# Altium PCB Pmod_RS232.PcbDoc
Units mm, origin at the board's own origin, x right, y up, seen from the top; angles counter-clockwise.
Board outline 40 x 35 mm, 2 copper layers (Top Layer, Bottom Layer); 13 components, 21 nets, 53 pads, 7 vias.
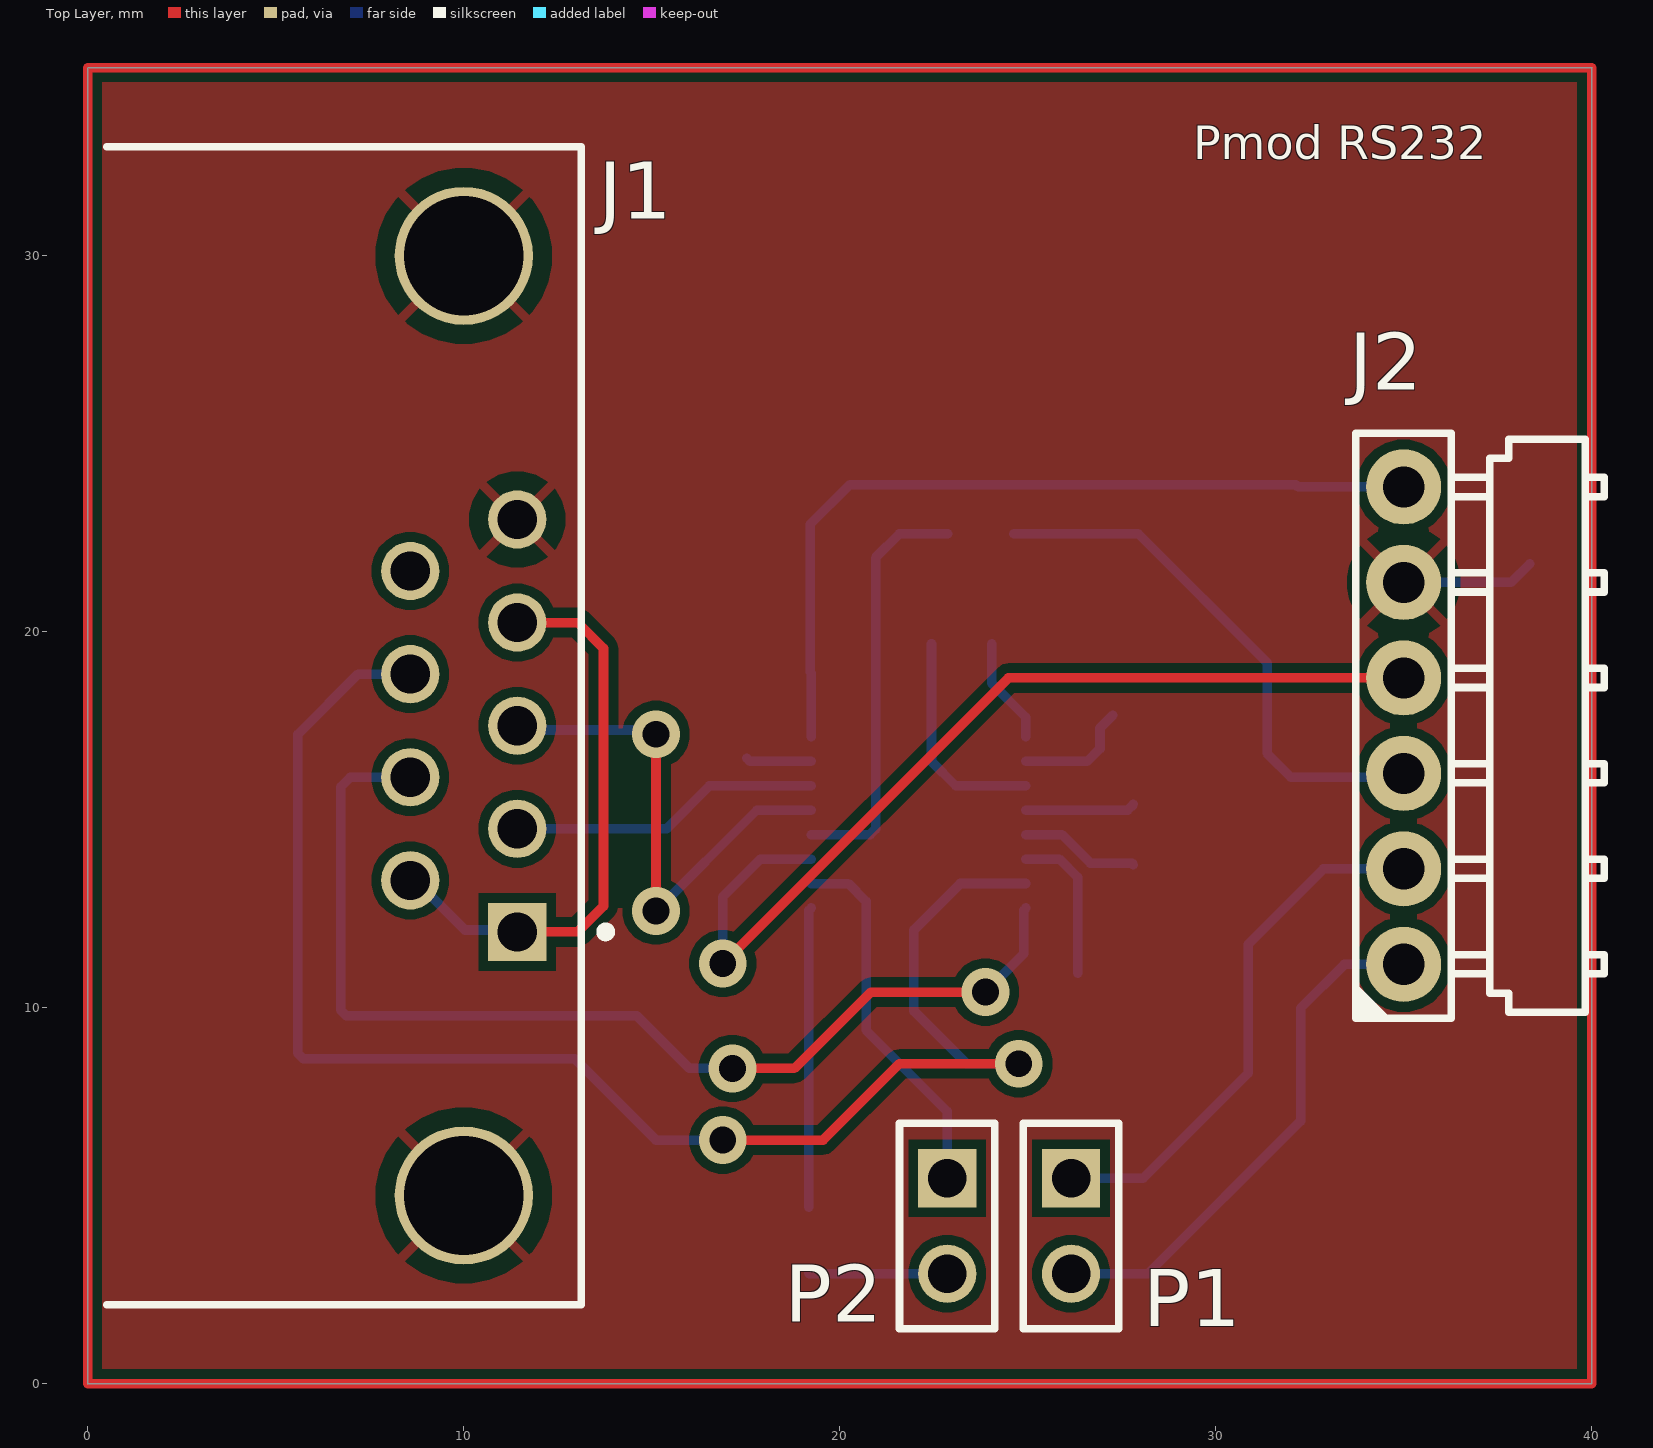
[diagram p0: Top Layer view]
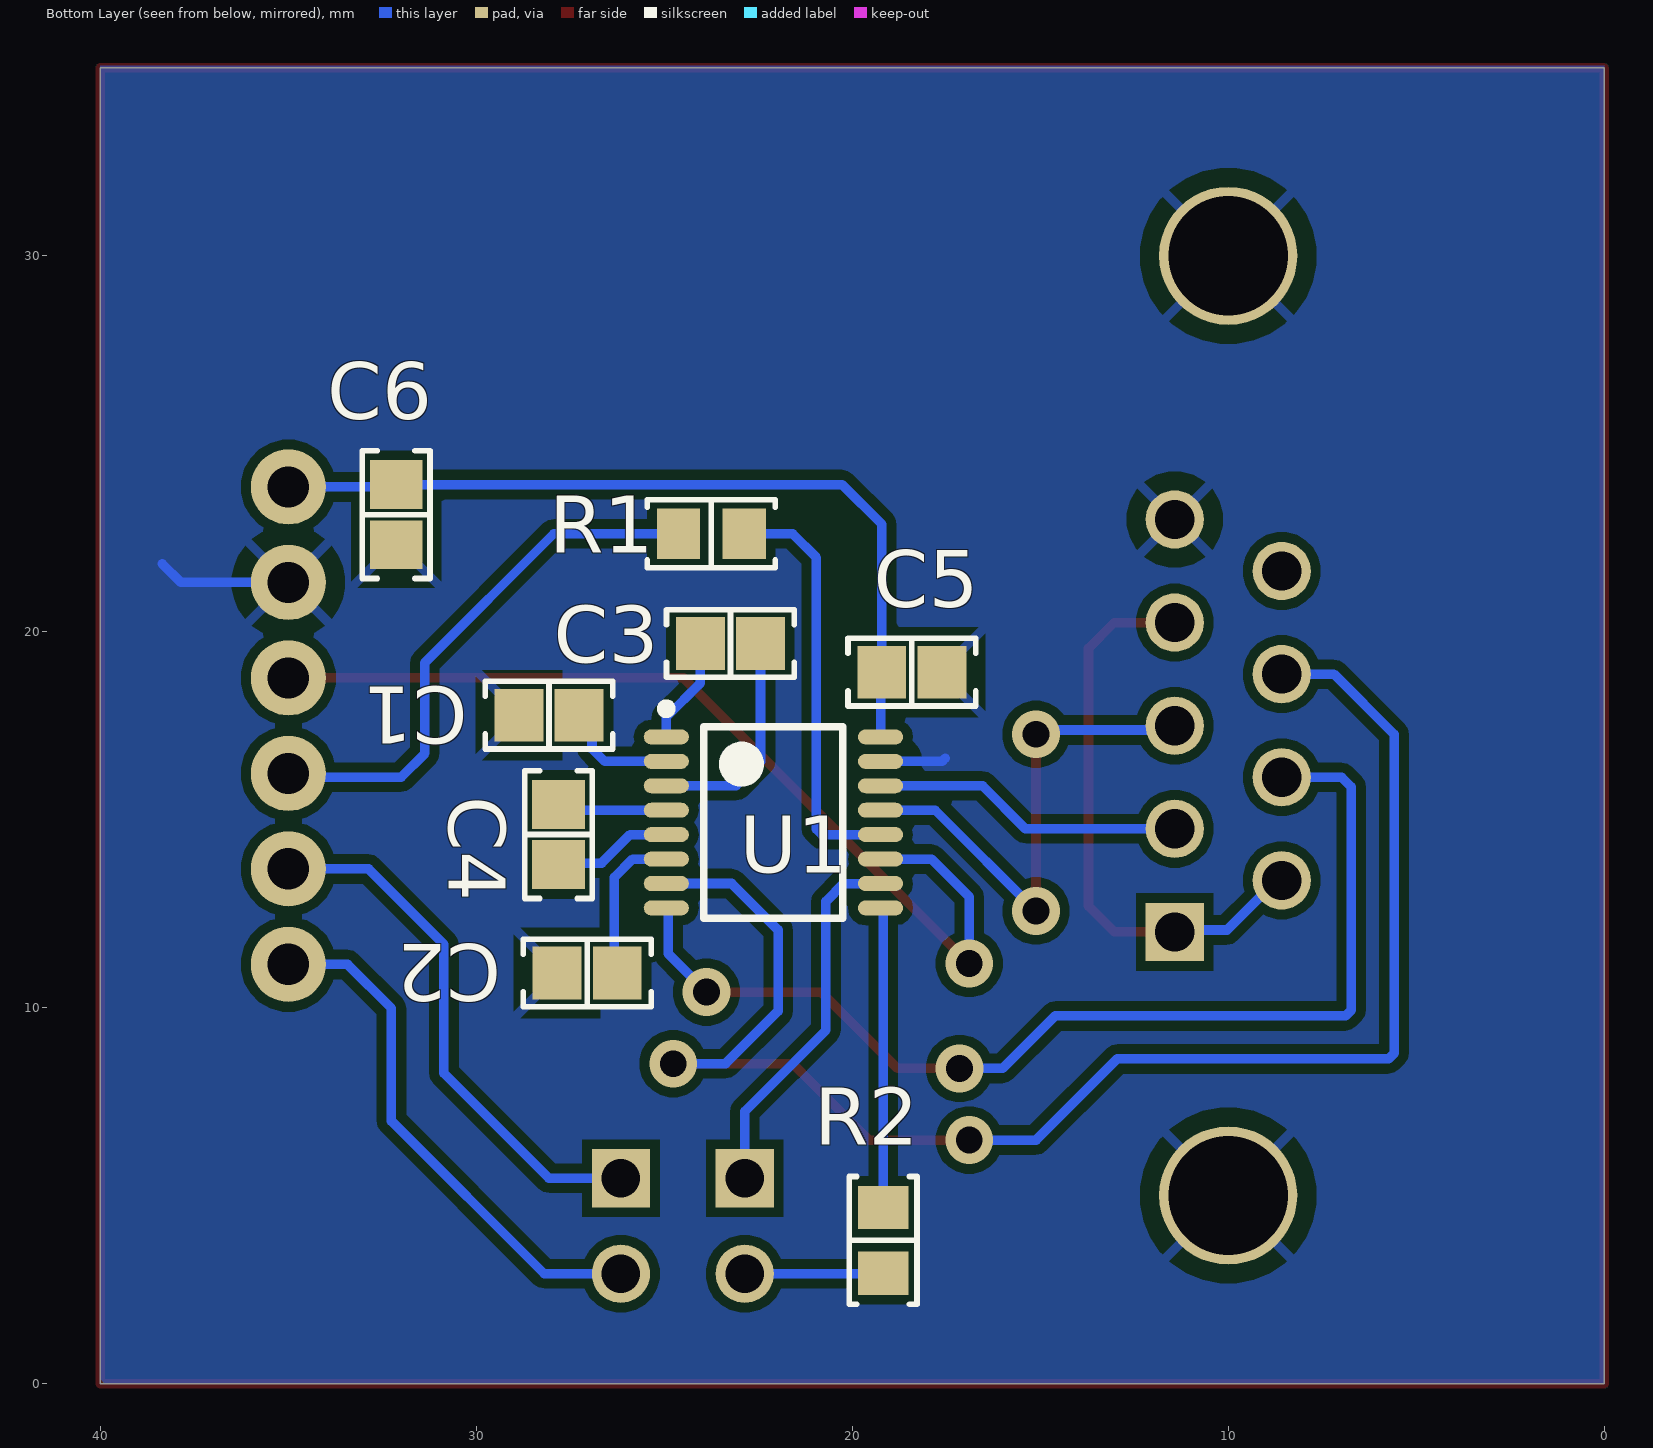
[diagram p1: Bottom Layer view, seen from below]
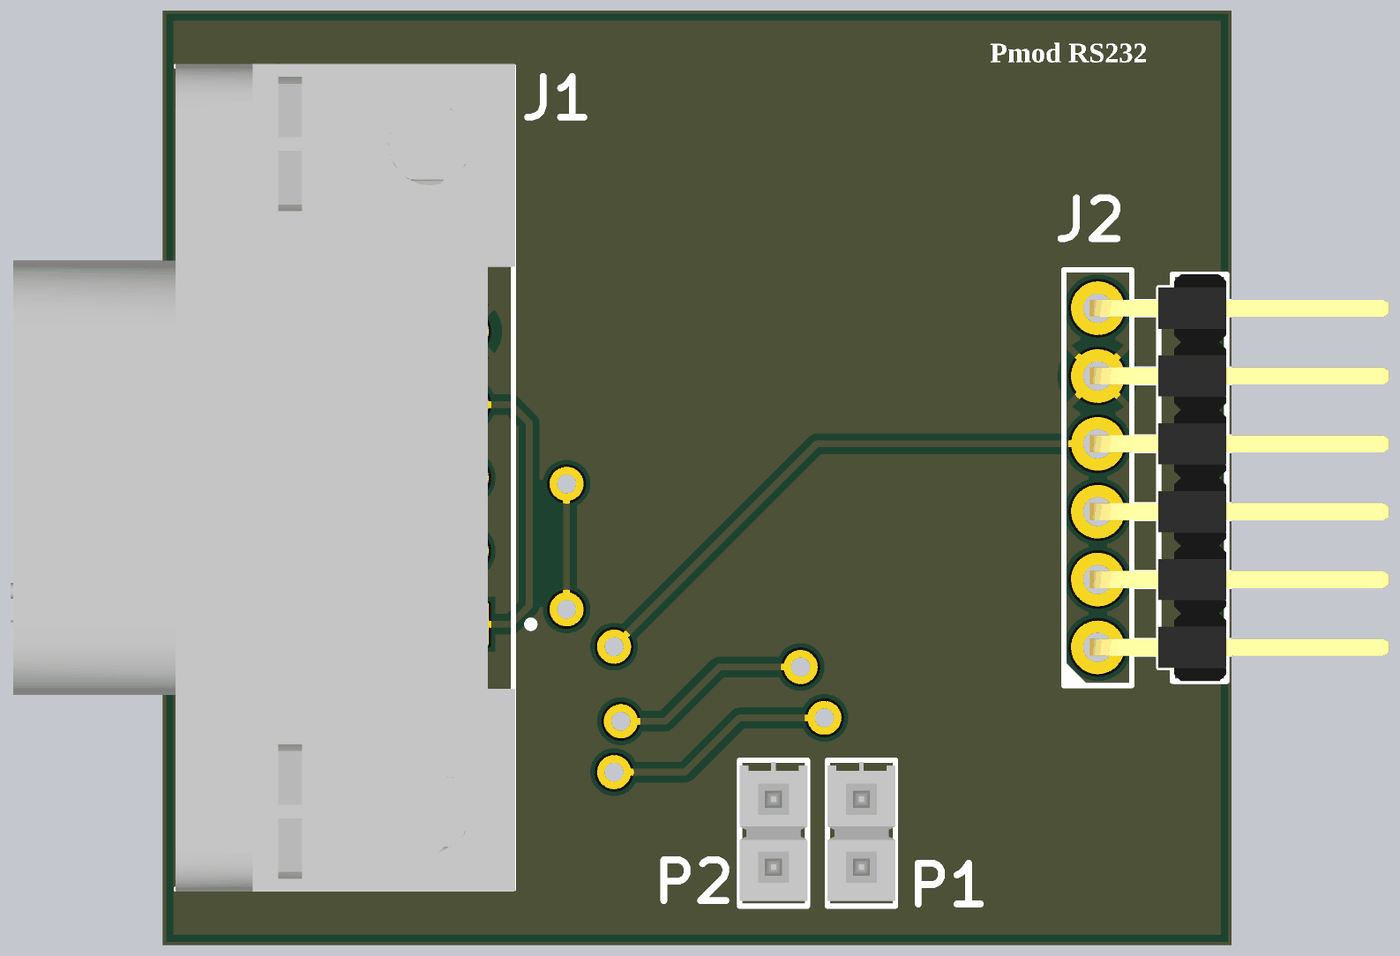
[diagram p2: 3D render of the assembled board from above, using the file's embedded part models]
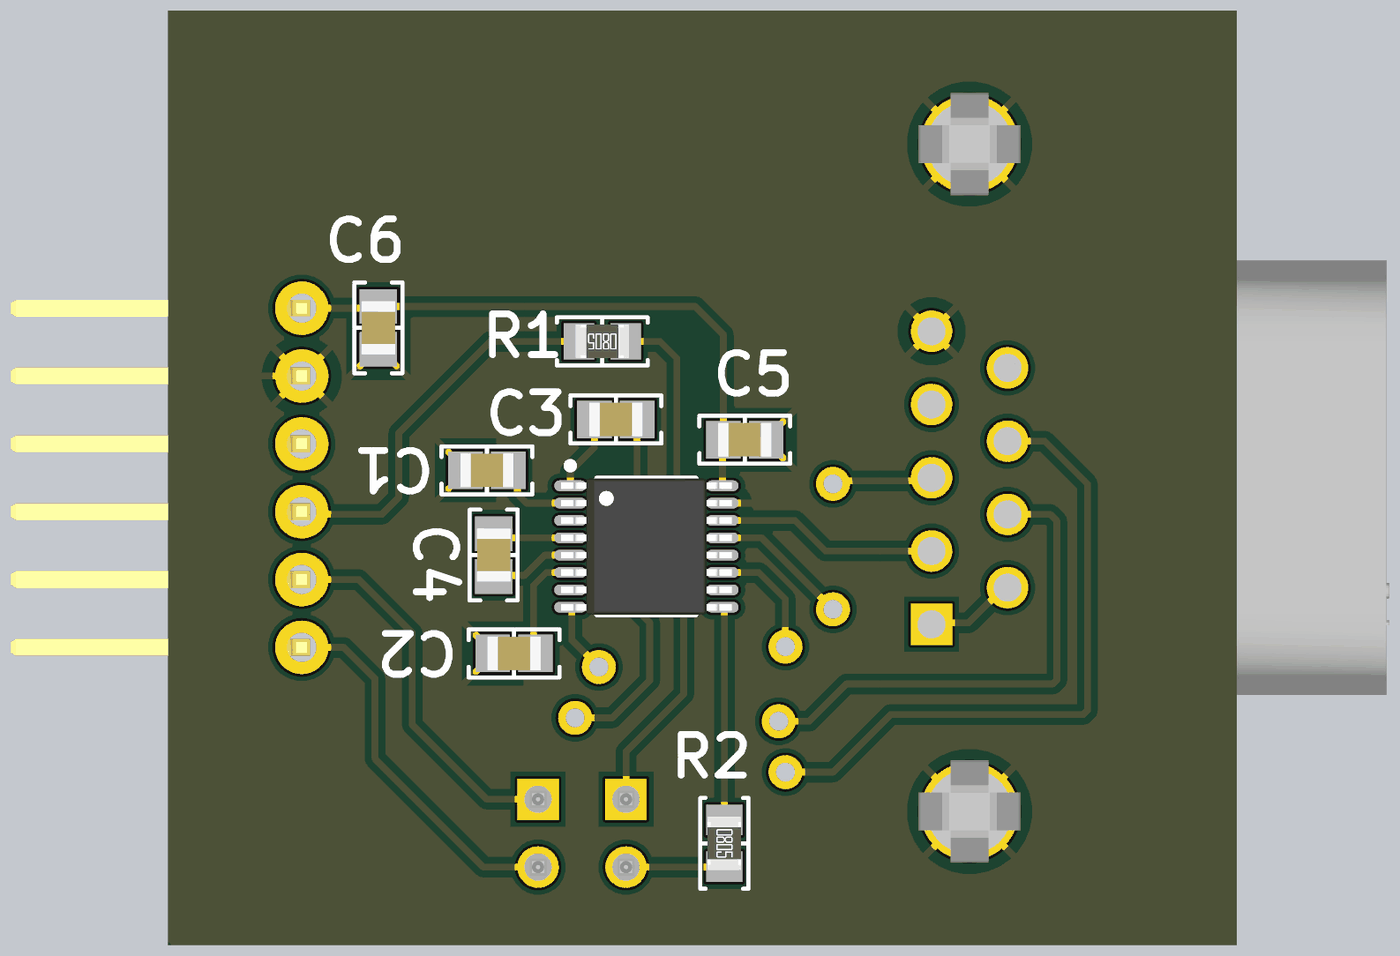
[diagram p3: 3D render of the assembled board from below, using the file's embedded part models]

## Layer stack, top to bottom
Top Solder: solder mask 0.0102, Solder Resist, Dk 3.5
Top Layer: signal copper 0.0356
Dielectric 1: dielectric 0.32, FR-4, Dk 4.8
Bottom Layer: signal copper 0.0356
Bottom Solder: solder mask 0.0102, Solder Resist, Dk 3.5

## Board outline
0,0 0,35 40,35 40,0

## Design rules (kind name [scope] priority, off if disabled: settings)
Clearance [All] p1: gap=0.254 ignorepadtopadclearanceinfootprint=FALSE except(0: Arc-Hole Track-Hole SMDPad-Hole THPad-Hole Via-Hole Fill-Hole Poly-Hole Region-Hole Text-Hole)
PolygonConnect [All] p1: connectstyle=Relief reliefconductorwidth=0.254 reliefentries=4 polygonreliefangle="45 Angle" airgapwidth=0.5
RoutingVias [All] p1: holewidth=0.711 width=1.27 viastyle="Through Hole" minholewidth=0.711 minwidth=1.27 maxholewidth=0.711 maxwidth=1.27
SolderMaskExpansion [All] p1: expansion=0.1 istentingtop=FALSE
Width [All] p1: maxlimit=0.254 minlimit=0.254 preferedwidth=0.254
30 further rules are at their usual default settings.

## Components (designator, comment, footprint, x,y, rotation, side; value= is the part's Value field where it differs from the comment)
C1 "0.1 µF" "CAP 0805_2012" 28.067,17.78 r0 bottom
C2 "0.1 µF" "CAP 0805_2012" 27.051,10.922 r0 bottom
C3 "0.1 µF" "CAP 0805_2012" 23.241,19.685 r0 bottom
C4 "0.1 µF" "CAP 0805_2012" 27.813,14.605 r90 bottom
C5 "0.1 µF" "CAP 0805_2012" 18.415,18.923 r0 bottom
C6 "2.2 µF" "CAP 0805_2012" 32.131,23.114 r270 bottom
J1 "5747844-4" TE-5747844-4_V 10,17.5 r90 top
J2 "M20-9960645" "HARWIN M20-9960645" 35,17.5 r90 top
P1 "TSW-102-26-L-S" SMTC-TSW-102-26-XX-S 26.154,5.461 r270 top
P2 "TSW-102-26-L-S" SMTC-TSW-102-26-XX-S 22.86,5.461 r270 top
R1 "100 Ohms" "RES 0805_2012" 23.749,22.606 r0 bottom
R2 "100 Ohms" "RES 0805_2012" 19.177,3.81 r270 bottom
U1 "ST3232BTR" STM-TSSOP-16_L 22.098,14.927 r180 bottom

## Footprints (in the part's own frame and the unit in brackets; to place one, negate y for a bottom-side part, rotate by r counter-clockwise, add the part's x,y. Pads: shape width x height; smd on the part's side, far side on the other; paste and mask are expansions set on the pad)
"CAP 0805_2012" [mm] "Chip Capacitor, 2-Leads, Body 2.00x1.20mm, IPC Medium Density"
  rect 1.3x1.4 smd: 1(-0.8,0) 2(0.8,0)
  silkscreen extent -1.7,-0.9 1.7,0.9, body extent -1,-0.64 1,0.64, height 1.26
"HARWIN M20-9960645" [mm] "2.54mm DIL PC TAIL PIN HEADER ASSEMBLY"
  round 2 hole 1.1: 1(-6.35,0) 2(-3.81,0) 3(-1.27,0) 4(1.27,0) 5(3.81,0) 6(6.35,0)
  silkscreen extent -7.78,-5.33 7.78,1.3, body extent -7.62,-10.9 7.62,0.32, height 2.54
"RES 0805_2012" [mm] "Chip Resistor, 2-Leads, Body 2.00x1.25mm, IPC Medium Density"
  rect 1.15x1.35 smd: 1(-0.875,0) 2(0.875,0)
  silkscreen extent -1.7,-0.9 1.7,0.9, body extent -1,-0.62 1,0.63, height 0.6
SMTC-TSW-102-26-XX-S [mm] ".025 SQ Post Terminal Strip Assembly, 1x2 Pins, Vertical, 2.54mm Pitch, Male"
  rect 1.55x1.55 hole 1.02: 1(0,0)
  round 1.55 hole 1.02: 2(2.54,0)
  silkscreen extent -1.46,-1.27 4,1.27, body extent -1.4,-1.27 3.81,1.27, height 8.38
STM-TSSOP-16_L [mm] "TSSOP, 16-Leads, Body 5.10x4.50mm, Pitch 0.65mm, IPC High Density"
  oval 1.2x0.4 smd: 1(-2.85,2.275) 2(-2.85,1.625) 3(-2.85,0.975) 4(-2.85,0.325) 5(-2.85,-0.325) 6(-2.85,-0.975) 7(-2.85,-1.625) 8(-2.85,-2.275) 9(2.85,-2.275) 10(2.85,-1.625) 11(2.85,-0.975) 12(2.85,-0.325) 13(2.85,0.325) 14(2.85,0.975) 15(2.85,1.625) 16(2.85,2.275)
  silkscreen extent -2.98,-2.55 1.85,3.15, body extent -3.2,-2.55 3.2,2.55, height 1.2
TE-5747844-4_V [mil] "TH, 9-Leads, Body 30.81x18.796mm, Pitch 1.3716mm"
  rect 61.02x61.02 hole 41: 1(-216,-56)
  round 61.02 hole 41: 2(-108,-56) 3(0,-56) 4(108,-56) 5(216,-56) 6(-162,56) 7(-54,56) 8(54,56) 9(162,56)
  round 144.69 hole 125: MH1(-492,0) MH2(492,0)
  silkscreen extent -606,-154 607,374, body extent -610,-125 610,618, height 494

## Part data
C1 C2 C3 C4 C5: library part CC0805MRX7R9BB104, "CAP CER 0.1UF 50V X7R 0805", Part Number=CC0805MRX7R9BB104
C6: library part CL21A225KB9LNNC, "CAP CER 2.2UF 50V X5R 0805", Part Number=CL21A225KB9LNNC
J1: library part CMP-1684-00001-6, "Female D-Sub Receptacle, Pitch 1.3716 mm, 9 Position, Height 12.9286 mm, -55 to 105 degC, RoHS, Tray", Colour=Black, Current Rating="6 A", Manufacturer="TE Connectivity", Max Operating Temperature="105 degC", Min Operating Temperature="-55 degC", Package Quantity=130, Voltage Rating="125 V", ComponentLink1Description="Manufacturer URL", ComponentLink1URL=http://www.te.com/, ComponentLink2Description=Datasheet, ComponentLink2URL=http://www.te.com/commerce/DocumentDelivery/DDEController?Action=srchrtrv&DocNm=5747844&DocType=Customer+Drawing&DocLang=English, Contact Finish=Gold, Contact Material=Bronze, Contact Plating=Gold, DatasheetVersion="Rev. P, 03/2011", Height="12.54 mm", Lead Pitch="2.74 mm", Length="30.81 mm", Mount="Through Hole", Mounting Technology="Through Hole", PackageDescription="Female D-Sub Receptacle, Pitch 1.3716 mm, 9 Position, Height 12.9286 mm", PackageReference=5747844-4, packaging=Tray, Pins=9, REACH SVHC="No SVHC", RoHSCompliant=true, Rows=2
J2: "CONN HEADER R/A 6POS 2.54MM", Part Number=M20-9960645
P1 P2: library part CMP-1024-00330-1, "0.025\" SQ Post Header, Through-hole, Vertical, -55 to 125 degC, 2.54 mm Pitch, 2-Pin, Male, RoHS", Manufacturer=Samtec, Temperature Range="-55 to 125 degC", ComponentLink1Description="Manufacturer URL", ComponentLink1URL=http://www.samtec.com, ComponentLink2Description=Datasheet, ComponentLink2URL=http://www.samtec.com/documents/webfiles/pdf/TSW_TH.PDF, ComponentLink3Description="Package Specification", ComponentLink3URL=http://www.samtec.com/documents/webfiles/cpdf/TSW-XXX-XX-XXX-X-XX-XXX-MKT.pdf, DatasheetVersion=F-214, Mounting Technology=Through-hole, Orientation=Vertical, PackageDescription=".025[0.64] SQ. Post Terminal Strip Assembly", PackageReference=TSW-102-26-XX-S, PackageVersion="DM, 8/1988", PartNumber=TSW-102-26-L-S, Pitch="2.54 mm", RoHS=True
R1 R2: library part RQ73C2A100RBTDF, "RQ 0805 100R 0.1% 10PPM 1K RL", Part Number=RQ73C2A100RBTDF
U1: library part CMP-2000-07155-1, "RS-232 Driver and Receiver, 3 to 5.5 V, -40 to 85 degC, 16-Pin TSSOP, RoHS, Tape and Reel", Dual Supply Voltage (Max)=NotRequiredV, Manufacturer=STMicroelectronics, Operating Temp Range=-40Cto85C, Operating Temperature Classification=Industrial, Package Description="16-Pin Thin Shrink Small Outline Package, Body 5 x 4.4 mm, Pitch 0.65 mm", Package Reference=TSSOP-16, Package Type=TSSOP, Power Supply Requirement=Single, Single Supply Voltage (Max)=5.5V, Single Supply Voltage (Min)=3V, Single Supply Voltage (Typ)=3.3/5V, Supply Current=2mA, Data Rate=0.4kbps, Data Transmission Topology=Point-to-Point, Datasheet URL=http://www.st.com/content/ccc/resource/technical/document/datasheet/group1/40/2c/7f/62/3a/3f/47/3c/CD00002253/files/CD00002253.pdf/jcr:content/translations/en.CD00002253.pdf, Datasheet Version="Rev. 12, 01/2016", DELETED=Compliant, Dual Supply Voltage (Min)=NotRequiredV, Dual Supply Voltage (Typ)=NotRequiredV, Manufacturer URL=http://www.st.com/, Mounting=SurfaceMount, Mounting Technology=SurfaceMount, Number of Receivers=2, Number of Transceivers=1, Number of Transmitters=2, packaging=TapeandReel, Pin Count=16, Rad Hardened=No, Receiver Signal Type=Single-Ended, Transmitter Signal Type=Single-Ended, Interface Circuit Standard 1=RS-232

## Via types
v1: diameter 1.27, hole 0.711, Top Layer to Bottom Layer, 7 vias

## Nets (pads, with @x,y where several pads share a name; then routed paths per layer and width w, separated by ;. In a path a pad name is that pad's centre, name@x,y a point inside that pad or via, vN(x,y) a via of type N, cw(c..) or ccw(c..) an arc to the next point about the centre after c; other vN are vias at no path point)
GND: C1.2 C2.2 C5.1 C6.2 J1.5 J1.MH1 J1.MH2 J2.5 U1.15 | length 5.3
  Bottom Layer w0.254: 17.526,16.637 17.611,16.552 U1.15 ; J2.5 37.858,21.31 38.354,21.806
NetC1_1: C1.1 U1.2 | length 3.1
  Bottom Layer w0.254: U1.2 26.585,16.552 26.924,16.891 26.924,17.437 C1.1
NetC2_1: C2.1 U1.6 | length 4.1
  Bottom Layer w0.254: U1.6 25.843,13.952 26.327,13.468 C2.1@26.327,10.922
NetC3_1: C3.1 U1.3 | length 5.9
  Bottom Layer w0.254: C3.1 22.441,16.548 23.087,15.902 U1.3
NetC3_2: C3.2 U1.1 | length 2.9
  Bottom Layer w0.254: C3.2 24.041,18.631 24.948,17.724 U1.1
NetC4_1: C4.1 U1.5 | length 3.2
  Bottom Layer w0.254: U1.5 25.911,14.602 26.67,13.843 27.775,13.843 C4.1
NetC4_2: C4.2 U1.4 | length 2.9
  Bottom Layer w0.254: U1.4 27.66,15.252 C4.2
NetJ1_1: J1.1 J1.4 J1.6 | length 15.4
  Top Layer w0.254: J1.1 13.03,12.014 13.716,12.7 13.716,19.558 13.031,20.243 J1.4
  Bottom Layer w0.254: J1.6 8.713,13.385 10.033,12.065 11.371,12.065 J1.1
NetJ1_2: J1.2 U1.14 | length 8.3
  Bottom Layer w0.254: J1.2 15.392,14.757 16.537,15.902 U1.14
NetJ1_3: J1.3 U1.13 | length 13.7
  Top Layer w0.254: v1(15.113,12.573) v1(15.113,17.272)
  Bottom Layer w0.254: J1.3 11.536,17.386 14.999,17.386 v1(15.113,17.272) ; v1(15.113,12.573) 17.792,15.252 U1.13
NetJ1_7: J1.7 U1.8 | length 29
  Top Layer w0.254: v1(17.145,8.382) 18.796,8.382 20.828,10.414 v1(23.876,10.414)
  Bottom Layer w0.254: J1.7 6.984,16.128 6.731,15.875 6.731,9.928 6.88,9.779 14.605,9.779 16.002,8.382 v1@16.891,8.382 ; v1(23.876,10.414) 24.892,11.43 24.892,12.584 24.948,12.64 U1.8
NetJ1_8: J1.8 U1.7 | length 42.1
  Top Layer w0.254: v1(16.891,6.477) 19.558,6.477 21.59,8.509 v1(24.765,8.509)
  Bottom Layer w0.254: J1.8 7.188,18.872 5.588,17.272 5.588,8.785 5.737,8.636 12.954,8.636 15.113,6.477 v1(16.891,6.477) ; v1(24.765,8.509) 23.368,8.509 21.971,9.906 21.971,12.065 23.208,13.302 U1.7
NetJ2_1: J2.1 P1.2 | length 14
  Bottom Layer w0.254: P1.2 28.194,2.921 32.258,6.985 32.258,9.985 33.423,11.15 J2.1
NetJ2_2: J2.2 P1.1 | length 14.3
  Bottom Layer w0.254: P1.1 28.067,5.461 30.861,8.255 30.861,11.684 32.867,13.69 J2.2
NetJ2_3: J2.3 R1.2 | length 14.5
  Bottom Layer w0.254: R1.2 27.94,22.606 31.369,19.177 31.369,16.764 32.004,16.129 34.899,16.129 J2.3
NetJ2_4: J2.4 U1.11 | length 25.8
  Top Layer w0.254: v1(16.891,11.176) 24.485,18.77 J2.4
  Bottom Layer w0.254: v1(16.891,11.176) 16.891,12.954 17.889,13.952 U1.11
NetP2_1: P2.1 U1.10 | length 9.9
  Bottom Layer w0.254: U1.10 19.251,13.299 20.229,13.299 20.701,12.827 20.701,9.398 22.86,7.239 P2.1
NetP2_2: P2.2 R2.2 | length 3.7
  Bottom Layer w0.254: R2.2 19.191,2.921 P2.2
NetR1_1: R1.1 U1.12 | length 11.2
  Bottom Layer w0.254: U1.12 20.806,14.602 20.955,14.751 20.955,21.971 21.59,22.606 R1.1
NetR2_1: R2.1 U1.9 | length 8
  Bottom Layer w0.254: R2.1 19.177,12.584 19.244,12.652 U1.9
VCC: C5.2 C6.1 J2.6 U1.16 | length 21.9
  Bottom Layer w0.254: U1.16 19.248,18.89 C5.2 19.215,22.86 20.269,23.914 C6.1 32.195,23.85 J2.6
pads on no net: J1.9
copper on no net: | length 150
  Top Layer w0.254: 0,0 40,0 40,35 0,35 0,0

## Polygon pours and split planes (outlines as drawn)
GND on Top Layer "GND_L01_P001" (solid, remove dead copper, pour order 1): 0,35 40,35 40,0 0,0
GND on Bottom Layer "GND_L02_P000" (solid, remove dead copper, pour order 0): 0,35.052 40.005,35.052 40.005,0.127 39.878,0 0,0

## Silkscreen, mask and mechanical layers (free items; w line width, h text height)
Top Overlay:
  text "Pmod RS232" at 29.409,32.27 h1.52